# Altium PCB MainPCB.PcbDoc
Units mm, origin at the board's own origin, x right, y up, seen from the top; angles counter-clockwise.
Board outline 55 x 55 mm, 2 copper layers (Top Layer, Bottom Layer); 53 components, 38 nets, 207 pads, 63 vias.
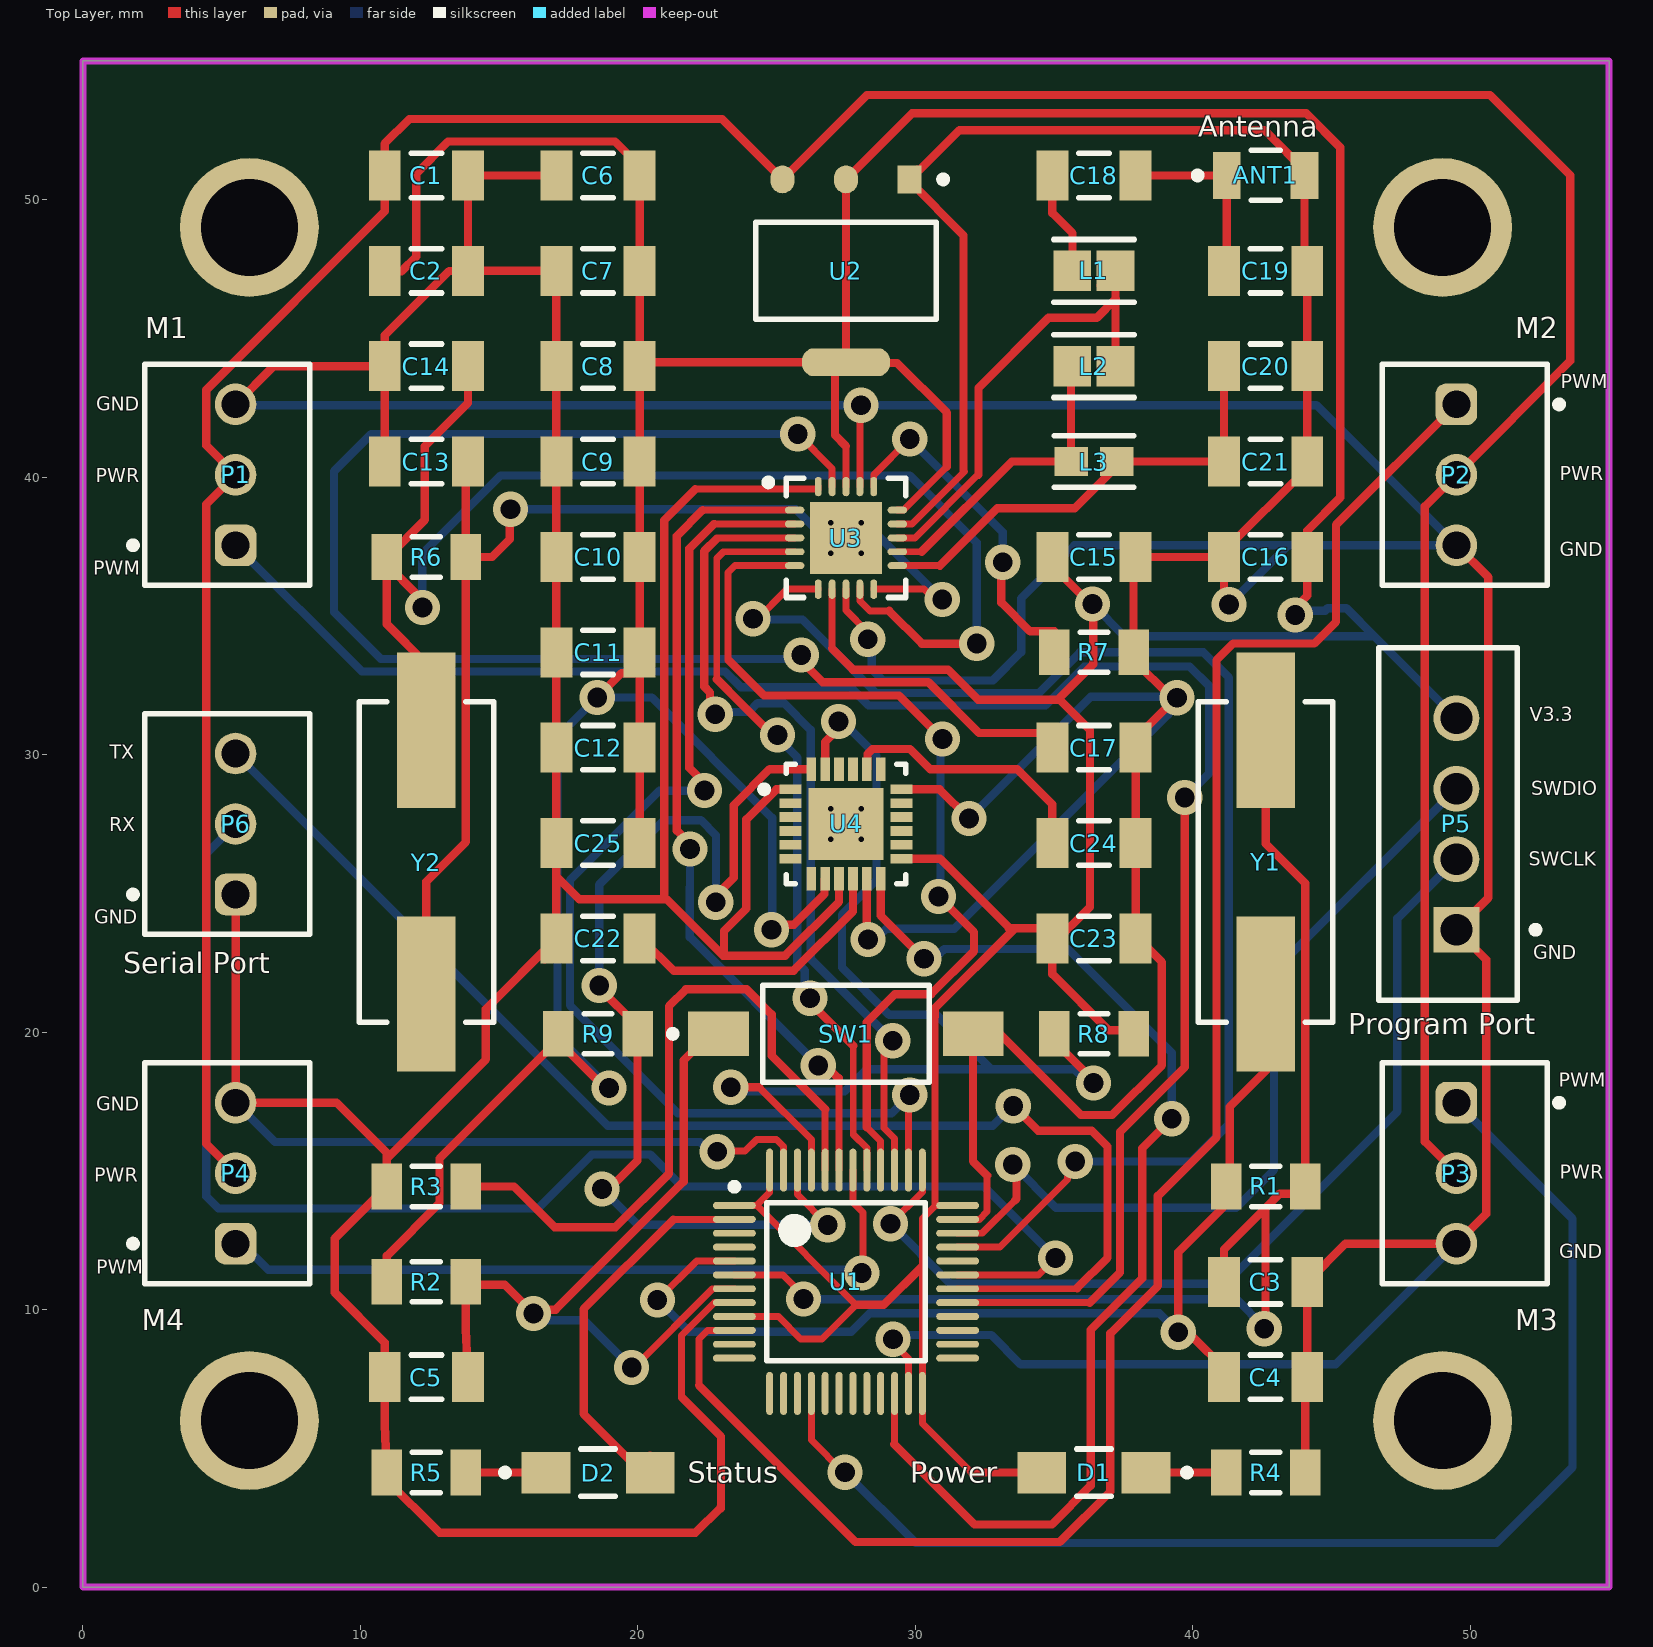
[diagram p0: Top Layer view]
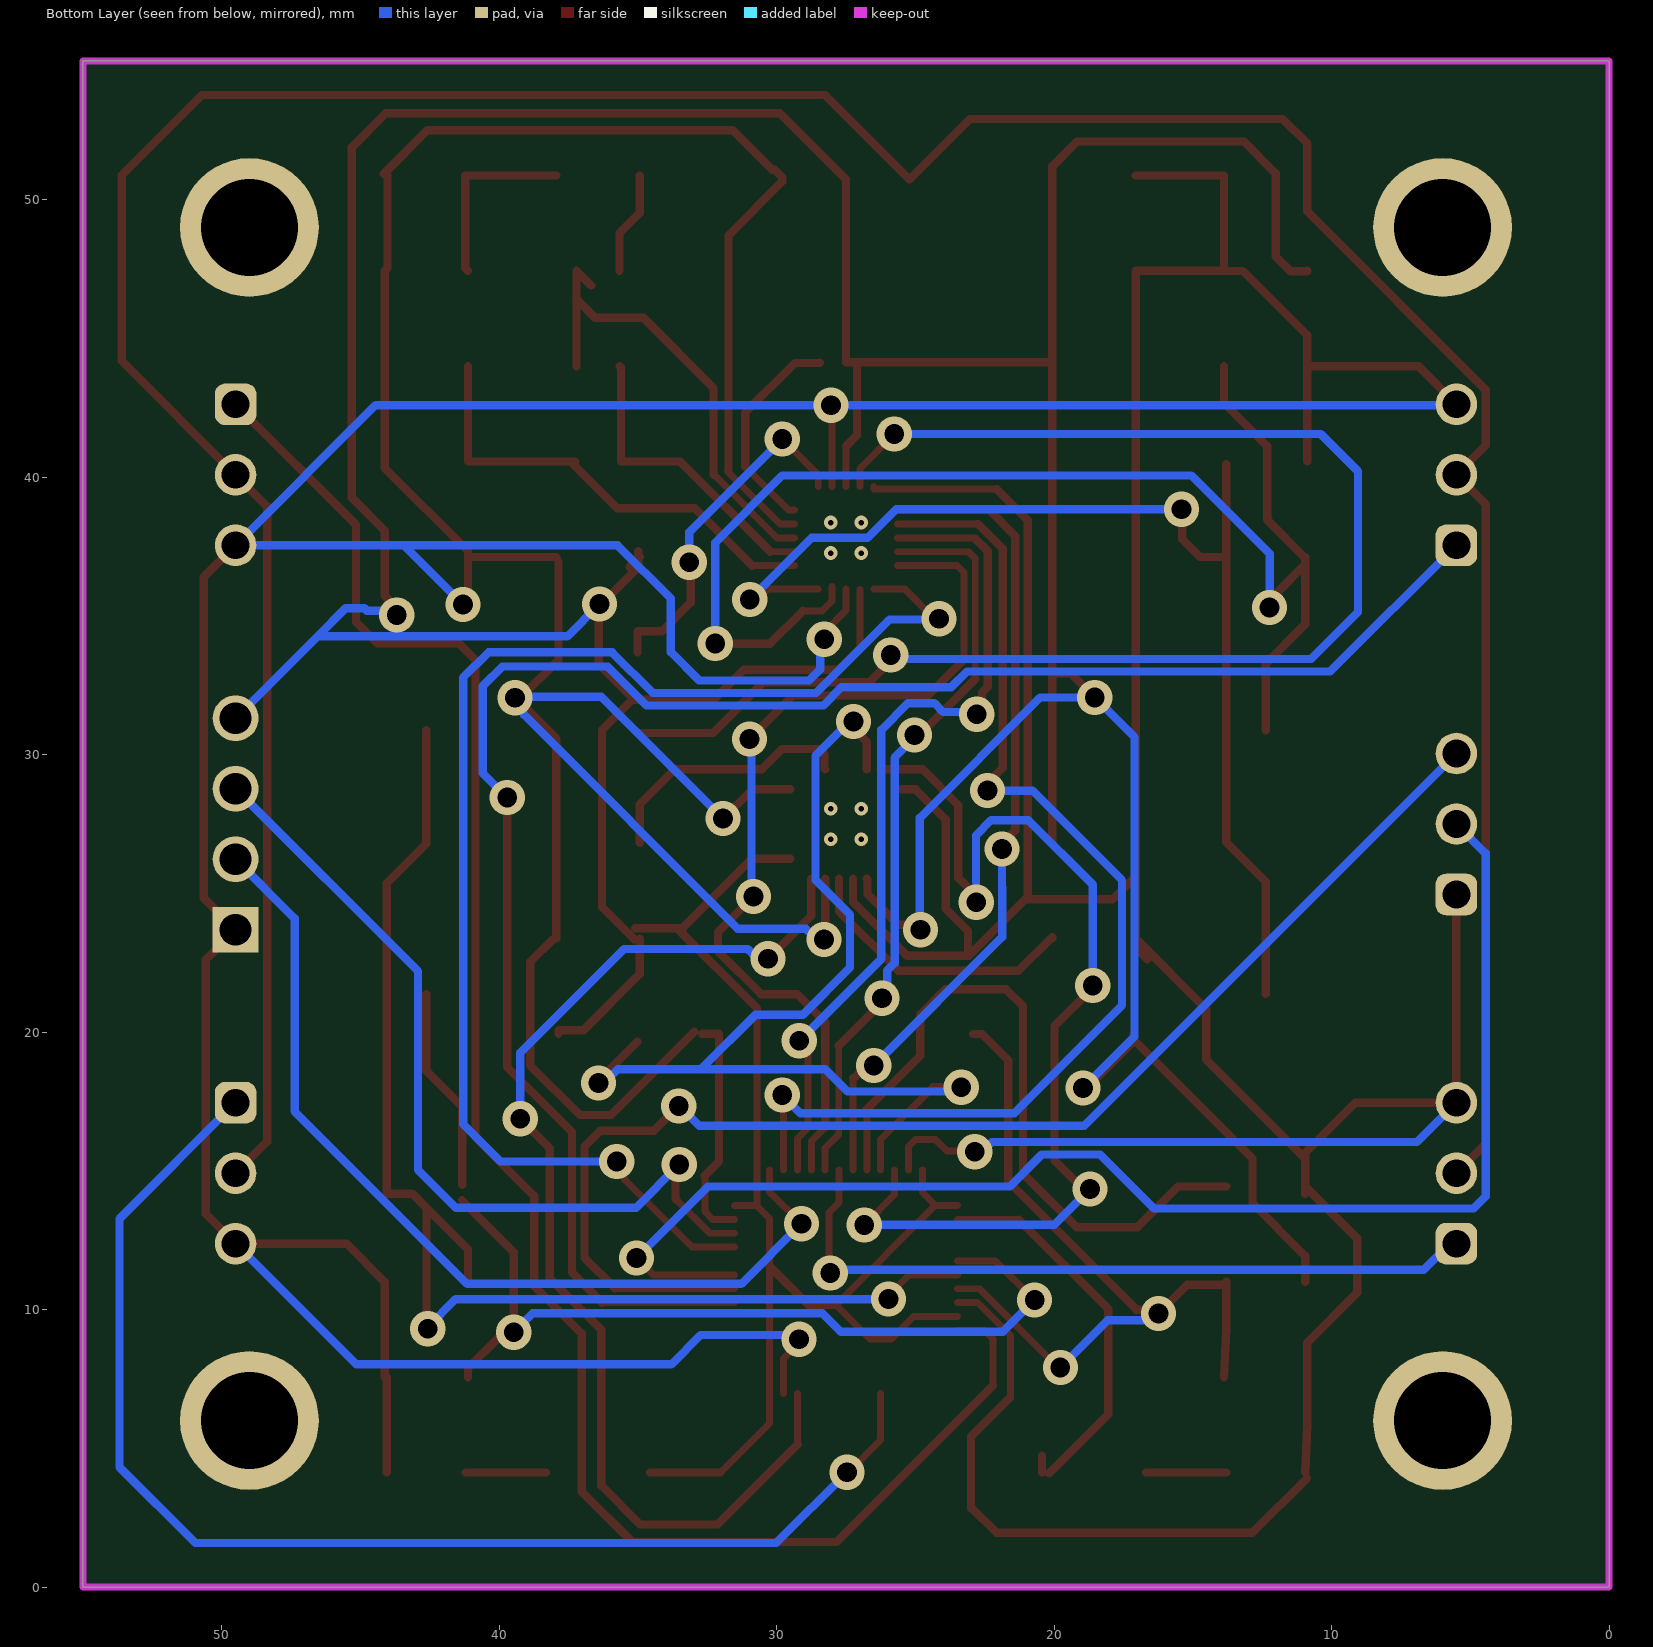
[diagram p1: Bottom Layer view, seen from below]

## Layer stack, top to bottom
Top Solder: solder mask 0.0102, Solder Resist, Dk 3.5
Top Layer: signal copper 0.0356
Dielectric 1: dielectric 0.32, FR-4, Dk 4.8
Bottom Layer: signal copper 0.0356
Bottom Solder: solder mask 0.0102, Solder Resist, Dk 3.5

## Board outline
0,0 55,0 55,55 0,55

## Design rules (kind name [scope] priority, off if disabled: settings)
Clearance [All] p1: gap=0.15 ignorepadtopadclearanceinfootprint=TRUE
HoleSize [All] p1: absolutevalues=TRUE maxlimit=5 minlimit=0.3 maxpercent=80.000 minpercent=20.000
HoleToHoleClearance [All] p1: gap=1.3 allowstackedmicrovias=FALSE
PolygonConnect [All] p1: connectstyle=Relief reliefconductorwidth=0.254 reliefentries=4 polygonreliefangle="90 Angle" airgapwidth=0.254
RoutingCorners [All] p1: cornerstyle=45-Degree minsetback=5 maxsetback=5
RoutingVias [All] p1: holewidth=0.711 width=1.27 viastyle="Through Hole" minholewidth=0.711 minwidth=1.27 maxholewidth=0.711 maxwidth=1.27
SMDNeckDown [All] p1: percent=100.000
SolderMaskExpansion [All] p1: expansion=0.102 istentingtop=FALSE
Width [All] p1: maxlimit=0.4 minlimit=0.2 preferedwidth=0.3
27 further rules are at their usual default settings.

## Classes and differential pairs
component class NRF24L01: ANT1 C13 C14 C15 C16 C17 C18 C19 C20 C21 L1 L2 L3 R6 R7 U3 Y2
component class MPU6050: C22 C23 C24 C25 R8 R9 U4
component class Microcontroller: C1 C2 C3 C4 C5 C6 C7 C8 C9 C10 C11 C12 D1 D2 P5 P6 R1 R2 R3 R4 R5 SW1 U1 U2 Y1
component class General: P1 P2 P3 P4

## Components (designator, comment, footprint, x,y, rotation, side; value= is the part's Value field where it differs from the comment)
ANT1 "Antenna" FP-211964-0001-MFG 42.625,50.875 r0 top
C1 "CAP 1206" CAPC1206(3216)190_N 12.375,50.875 r180 top value=10uF
C2 "CAP 1206" CAPC1206(3216)190_N 12.375,47.437 r180 top value=22uF
C3 "CAP 1206" CAPC1206(3216)190_N 42.625,11 r0 top value=22pf
C4 "CAP 1206" CAPC1206(3216)190_N 42.625,7.563 r0 top value=22pf
C5 "CAP 1206" CAPC1206(3216)190_N 12.375,7.563 r0 top value=100nf
C6 "CAP 1206" CAPC1206(3216)190_N 18.563,50.875 r0 top value=1uf
C7 "CAP 1206" CAPC1206(3216)190_N 18.563,47.437 r0 top value=10nf
C8 "CAP 1206" CAPC1206(3216)190_N 18.563,44 r0 top value=100nf
C9 "CAP 1206" CAPC1206(3216)190_N 18.563,40.562 r0 top value=100nf
C10 "CAP 1206" CAPC1206(3216)190_N 18.563,37.125 r0 top value=100nf
C11 "CAP 1206" CAPC1206(3216)190_N 18.563,33.687 r0 top value=100nf
C12 "CAP 1206" CAPC1206(3216)190_N 18.563,30.25 r0 top value=4.7uf
C13 "CAP 1206" CAPC1206(3216)190_N 12.375,40.562 r180 top value=22pf
C14 "CAP 1206" CAPC1206(3216)190_N 12.375,44 r180 top value=22pf
C15 "CAP 1206" CAPC1206(3216)190_N 36.437,37.125 r0 top value=10nf
C16 "CAP 1206" CAPC1206(3216)190_N 42.625,37.125 r180 top value=1nf
C17 "CAP 1206" CAPC1206(3216)190_N 36.437,30.25 r0 top value=33nf
C18 "CAP 1206" CAPC1206(3216)190_N 36.437,50.875 r0 top value=1.5pf
C19 "CAP 1206" CAPC1206(3216)190_N 42.625,47.437 r180 top value=1pf
C20 "CAP 1206" CAPC1206(3216)190_N 42.625,44 r180 top value=2.2nf
C21 "CAP 1206" CAPC1206(3216)190_N 42.625,40.562 r180 top value=4.7pf
C22 "CAP 1206" CAPC1206(3216)190_N 18.563,23.375 r180 top value=100nf
C23 "CAP 1206" CAPC1206(3216)190_N 36.437,23.375 r180 top value=10nf
C24 "CAP 1206" CAPC1206(3216)190_N 36.437,26.812 r180 top value=2.2nf
C25 "CAP 1206" CAPC1206(3216)190_N 18.563,26.812 r0 top value=100nf
D1 "Power" FP-CMD15-21-MFG 36.437,4.125 r180 top
D2 "Status" FP-CMD15-21-MFG 18.563,4.125 r0 top
L1 "LQM21NNR15K10D" FP-LQM21DN_00-IPC_B 36.437,47.437 r180 top
L2 "LQM21NNR15K10D" FP-LQM21DN_00-IPC_B 36.437,44 r180 top
L3 "LQG18HN2N2S00D" FP-LQG18HH_00-IPC_A 36.437,40.562 r0 top
P1 "M1" 61900311121 5.2,40.085 r270 top
P2 "M2" 61900311121 49.8,40.085 r90 top
P3 "M3" 61900311121 49.8,14.915 r90 top
P4 "M4" 61900311121 5.2,14.915 r270 top
P5 "Program Port" TECO-280371-2_V 49.5,27.5 r90 top
P6 "Serial Port" 61900311121 5.2,27.5 r270 top
R1 "ERJ-8GEY0R00V" RESC3216X70X50NL05T20 42.625,14.438 r0 top value=1M
R2 "ERJ-8GEY0R00V" RESC3216X70X50NL05T20 12.375,11 r180 top value=10K
R3 "ERJ-8GEY0R00V" RESC3216X70X50NL05T20 12.375,14.438 r0 top value=10K
R4 "ERJ-8GEY0R00V" RESC3216X70X50NL05T20 42.625,4.125 r180 top value=510
R5 "ERJ-8GEY0R00V" RESC3216X70X50NL05T20 12.375,4.125 r0 top value=510
R6 "ERJ-8GEY0R00V" RESC3216X70X50NL05T20 12.375,37.125 r0 top value=1M
R7 "ERJ-8GEY0R00V" RESC3216X70X50NL05T20 36.437,33.687 r0 top value=22K
R8 "ERJ-8GEY0R00V" RESC3216X70X50NL05T20 36.437,19.937 r0 top value=4.7K
R9 "ERJ-8GEY0R00V" RESC3216X70X50NL05T20 18.563,19.937 r0 top value=4.7K
SW1 "FSMSM" TECO-FSMSM-2_V 27.5,19.937 r0 top
U1 "STM32F103C8T6" STM-LQFP48_L 27.5,11 r0 top
U2 "AMS1117-3.3" FP-AMS1117-IPC_C 27.5,47.437 r270 top
U3 "NRF24L01P-T" NRSC-QFN-20_L 27.5,37.813 r0 top
U4 "MPU-6050" IS-QFN-24_V 27.5,27.5 r0 top
Y1 "ABLS-8.000MHZ-B2-T" FP-ABLS-MFG 42.625,26.125 r270 top
Y2 "ABLS-8.000MHZ-B2-T" FP-ABLS-MFG 12.375,26.125 r90 top

## Footprints (in the part's own frame and the unit in brackets; to place one, negate y for a bottom-side part, rotate by r counter-clockwise, add the part's x,y. Pads: shape width x height; smd on the part's side, far side on the other; paste and mask are expansions set on the pad)
61900311121 [mm] "2.54mm Male Locking Header, 3p"
  rrect50% 1.5x1.5 hole 1: 1(2.54,0.3)
  round 1.5 hole 1: 2(0,0.3) 3(-2.54,0.3)
  silkscreen extent -3.98,-3.52 3.98,2.97, body extent -3.81,-2.9 3.81,2.9, height 11.53
CAPC1206(3216)190_N [mm] "Chip Capacitor, Body 3.2x1.6mm, Height 1.9mm, IPC Medium Density"
  rect 1.15x1.8 smd: 1(-1.5,0) 2(1.5,0)
  silkscreen extent -0.55,-0.8 0.55,0.8, body extent -1.7,-0.9 1.7,0.9, height 1.9
FP-211964-0001-MFG [mm]
  rect 1x1.7 smd paste+0 mask+0: 1(-1.4,0) 2(1.4,0)
  silkscreen extent -2.57,-0.9 0.52,0.9, body extent -2,-1 2,1, height 0.25
FP-ABLS-MFG [mm]
  rect 5.6x2.1 smd paste+0 mask+0: 1(-4.75,0) 2(4.75,0)
  silkscreen extent -5.78,-2.42 5.77,2.42, body extent -7.65,-2.52 7.65,2.52, height 0.25
FP-AMS1117-IPC_C [mm]
  rect 1.004x0.872 smd paste+0 mask+0: 1(-3.295,2.29)
  rrect100% 1.004x0.872 smd paste+0 mask+0: 2(-3.295,0) 3(-3.295,-2.29)
  rrect87% 1.004x3.182 smd paste+0 mask+0: 4(3.295,0)
  silkscreen extent -3.42,-3.25 1.75,3.63, body extent -3.9,-3.35 3.9,3.35, height 0.25
FP-CMD15-21-MFG [mm]
  rect 1.75x1.5 smd paste+0 mask+0: 1(-1.875,0) 2(1.875,0)
  silkscreen extent -3.48,-0.85 0.63,0.85, body extent -2.85,-0.95 2.85,0.95, height 0.25
FP-LQG18HH_00-IPC_A [mm]
  rect 1.206x1.058 smd paste+0 mask+0: 1(-0.826,0) 2(0.826,0)
  silkscreen extent -1.43,-0.93 1.43,0.93, body extent -1.93,-1.03 1.93,1.03, height 0.25
FP-LQM21DN_00-IPC_B [mm]
  rect 1.354x1.456 smd paste+0 mask+0: 1(-0.776,0) 2(0.776,0)
  silkscreen extent -1.45,-1.13 1.45,1.13, body extent -1.7,-0.98 1.7,0.98, height 0.25
IS-QFN-24_V [mm] "QFN, 24-Leads, Body 4x4mm, Pitch 0.5mm, Thermal Pad 2.7x2.6mm"
  rect 0.8x0.35 smd: 1(-2,1.25) 2(-2,0.75) 3(-2,0.25) 4(-2,-0.25) 5(-2,-0.75) 6(-2,-1.25) 13(2,-1.25) 14(2,-0.75) 15(2,-0.25) 16(2,0.25) 17(2,0.75) 18(2,1.25)
  rect 0.35x0.85 smd mask+0.102: 7(-1.25,-1.975) 8(-0.75,-1.975) 9(-0.25,-1.975) 10(0.25,-1.975) 11(0.75,-1.975) 12(1.25,-1.975) 19(1.25,1.975) 20(0.75,1.975) 21(0.25,1.975) 22(-0.25,1.975) 23(-0.75,1.975) 24(-1.25,1.975)
  rect 2.7x2.6 smd: 25(0,0)
  silkscreen extent -3.07,-2.15 2.15,2.15, body extent -2,-2 2,2, height 0.95
NRSC-QFN-20_L [mm] "QFN, 20-Leads, Body 4x4mm, Pitch 0.5mm, Thermal Pad 2.6x2.6mm, IPC High Density"
  oval 0.7x0.25 smd: 1(-1.85,1) 2(-1.85,0.5) 3(-1.85,0) 4(-1.85,-0.5) 5(-1.85,-1) 11(1.85,-1) 12(1.85,-0.5) 13(1.85,0) 14(1.85,0.5) 15(1.85,1)
  oval 0.25x0.7 smd: 6(-1,-1.85) 7(-0.5,-1.85) 8(0,-1.85) 9(0.5,-1.85) 10(1,-1.85) 16(1,1.85) 17(0.5,1.85) 18(0,1.85) 19(-0.5,1.85) 20(-1,1.85)
  rect 2.6x2.6 smd: 21(0,0)
  silkscreen extent -2.92,-2.15 2.15,2.15, body extent -2,-2 2,2, height 0.95
RESC3216X70X50NL05T20 [mm] "Chip Resistor, 2-Leads, Body 3.20x1.60mm, IPC Medium Density"
  rect 1.1x1.65 smd: 1(-1.425,0) 2(1.425,0)
  silkscreen extent -0.5,-0.73 0.5,0.73, body extent -1.63,-0.82 1.62,0.82, height 0.7
STM-LQFP48_L [mm] "QFP, 48-Leads, Body 7x7mm, Pitch 0.5mm, IPC High Density"
  oval 1.55x0.25 smd: 1(-4.025,2.75) 2(-4.025,2.25) 3(-4.025,1.75) 4(-4.025,1.25) 5(-4.025,0.75) 6(-4.025,0.25) 7(-4.025,-0.25) 8(-4.025,-0.75) 9(-4.025,-1.25) 10(-4.025,-1.75) 11(-4.025,-2.25) 12(-4.025,-2.75) 25(4.025,-2.75) 26(4.025,-2.25) 27(4.025,-1.75) 28(4.025,-1.25) 29(4.025,-0.75) 30(4.025,-0.25) 31(4.025,0.25) 32(4.025,0.75) 33(4.025,1.25) 34(4.025,1.75) 35(4.025,2.25) 36(4.025,2.75)
  oval 0.25x1.55 smd: 13(-2.75,-4.025) 14(-2.25,-4.025) 15(-1.75,-4.025) 16(-1.25,-4.025) 17(-0.75,-4.025) 18(-0.25,-4.025) 19(0.25,-4.025) 20(0.75,-4.025) 21(1.25,-4.025) 22(1.75,-4.025) 23(2.25,-4.025) 24(2.75,-4.025) 37(2.75,4.025) 38(2.25,4.025) 39(1.75,4.025) 40(1.25,4.025) 41(0.75,4.025) 42(0.25,4.025) 43(-0.25,4.025) 44(-0.75,4.025) 45(-1.25,4.025) 46(-1.75,4.025) 47(-2.25,4.025) 48(-2.75,4.025)
  silkscreen extent -4.15,-2.85 2.85,3.55, body extent -3.5,-3.5 3.5,3.5, height 1.6
TECO-280371-2_V [mm] "Male Header, 4-Leads, Body 12.7x5mm, Pitch 2.54"
  rect 1.65x1.65 hole 1.15: 1(-3.81,0)
  round 1.65 hole 1.15: 2(-1.27,0) 3(1.27,0) 4(3.81,0)
  silkscreen extent -6.35,-2.98 6.35,2.8, body extent -6.22,-2.21 6.23,2.79, height 12.6
TECO-FSMSM-2_V [mm] "SMD, 2-Leads, Body 6x3.5mm, Pitch 9.19mm"
  rect 2.2x1.6 smd: 1(-4.595,0)
  rect 2.18x1.6 smd: 2(4.595,0)
  silkscreen extent -6.37,-1.75 3,1.75, body extent -4.98,-1.75 4.98,1.75, height 4.4

## Part data
ANT1: library part CMP-04721-000010-1, "2.4/5GHZ LTCC ANT 3.2X1.6MM"
C1 C2 C3 C4 C5 C6 C7 C8 C9 C10 C11 C12 C13 C14 C15 C16 C17 C18 C19 C20 C21 C22 C23 C24 C25: library part CMP-1037-04961-1, Case-EIA=1206, Case-Metric=3216, Rated Voltage="6.3 V", Tolerance=Â±10%, Max Thickness="1.9 mm", Technology=SMT
D1 D2: library part CMP-53976-000002-1, "LED RED DIFFUSED 1206 SMD", Colour=Red, Forward Current=20mA, Forward Voltage=2V, Manufacturer=VCC, Manufacturer Part Number=CMD15-21VRD/TR8, Package=CMD15-21, Power Dissipation=105mW, Reverse Voltage=5V, Temperature="-40°C to +85°C", Temperature Range High=+85°C, Temperature Range Low=-40°C, Automotive=No, Category=Diode, ComponentLink2Description=Datasheet, ComponentLink2URL=https://www.vcclite.com/wp-content/uploads/wpallimport/files/files/CMD1521SeriesRev1.pdf, Device Class L1=Optoelectronics, Device Class L2=LEDs, Device Class L3=unset, Digikey Description="LED RED DIFFUSED 1206 SMD", Height=1.3mm, Lead Free=Yes, Led Orientation="Top View", Luminous Intensity=4mcd, Mouser Description="Standard LEDs - SMD RED DIFFUSED", Octopart=https://octopart.com/cmd15-21vrd%2Ftr8-vcc-26668835, Peak Emmision Wavelength=640nm, RoHS=TRUE
L1: library part CMP-06042-016815-1, "Multilayer Type Inductor for General Circuits, 0805 (2012), 0.15μH, 10%, 0.32Ω, 250mA", Case Code (Imperial)=0805, Case Code (Metric)=2012, Current Rating=250mA, DC Resistance (DCR)=320mR, Inductance=3.9nH, Inductance Tolerance=10%, Max Operating Temperature=85°C, Min Operating Temperature=-40°C, Package Quantity=4000, Self Resonant Frequency=270MHz, Test Frequency=25MHz, Case/Package=0805, Core Material=Ferrite, DC Current=250mA, Depth=1.45mm, Height=0.85mm, Height - Seated (Max)=0.041inch, Lead Free="Lead Free", Length=2mm, Max DC Current=250mA, Military Standard=Not, Mount="Surface Mount", Number of Pins=2, Packaging="Tape and Reel", Q Factor=20, Radiation Hardening=No, REACH SVHC="No SVHC", RoHS Compliant=Yes, Series=LQM21N, Shielding=Shielded, Termination=SMD/SMT, Tolerance=10%, Width=1.25mm
L2: library part CMP-06042-016815-1, "Multilayer Type Inductor for General Circuits, 0805 (2012), 0.15μH, 10%, 0.32Ω, 250mA", Case Code (Imperial)=0805, Case Code (Metric)=2012, Current Rating=250mA, DC Resistance (DCR)=320mR, Inductance=8.2nH, Inductance Tolerance=10%, Max Operating Temperature=85°C, Min Operating Temperature=-40°C, Package Quantity=4000, Self Resonant Frequency=270MHz, Test Frequency=25MHz, Case/Package=0805, Core Material=Ferrite, DC Current=250mA, Depth=1.45mm, Height=0.85mm, Height - Seated (Max)=0.041inch, Lead Free="Lead Free", Length=2mm, Max DC Current=250mA, Military Standard=Not, Mount="Surface Mount", Number of Pins=2, Packaging="Tape and Reel", Q Factor=20, Radiation Hardening=No, REACH SVHC="No SVHC", RoHS Compliant=Yes, Series=LQM21N, Shielding=Shielded, Termination=SMD/SMT, Tolerance=10%, Width=1.25mm
L3: library part CMP-06042-006288-1, "Multilayer type RF Inductor 2.2nH ±0.3nH 0.1Ω 1100mA 0603", Case Code (Imperial)=0603, Case Code (Metric)=1608, Current Rating=500mA, DC Resistance (DCR)=100mR, Inductance=2.7nH, Max Operating Temperature=85°C, Min Operating Temperature=-40°C, Package Quantity=4000, Self Resonant Frequency=6GHz, Test Frequency=100MHz, Case/Package=0603, Core Material=Air, DC Current=500mA, Depth=0.95mm, Height=0.8mm, Height - Seated (Max)=0.037inch, Lead Free="Lead Free", Length=0.063inch, Max DC Current=500mA, Military Standard=Not, Mount="Surface Mount", Number of Pins=2, Packaging="Tape and Reel", Q Factor=12, Radiation Hardening=No, REACH SVHC="No SVHC", Shielding=Unshielded, Termination=SMD/SMT, Width=0.031inch
P1 P2 P3 P4 P6: library part CMP-1502-00585-2, Color=Beige, Contact Resistance=20mΩ, Current Rating=3A, Flammability Rating="UL94 V-0", Insulation Resistance=1GΩ, Max Operating Temperature=105°C, Min Operating Temperature=-40°C, Operating Supply Voltage=250V, Connector Type="Male Pin", Contact Gender=Male, Contact Material=Copper, Contact Mating Length=7.493mm, Contact Plating=Tin, Fastening Type=Friction, Gender=Male, Height=12.5mm, Housing Material=Nylon, Lead Pitch=2.54mm, Length=7.62mm, Mount="Through Hole", NexarPartId=18818222, Number of Contacts=3, Number of Pins=3, Number of Positions=3, Number of Rows=1, Orientation=Vertical, Packaging=Bulk, Pitch=2.54mm, REACH SVHC=Unknown, RoHS=Compliant, Termination="Through Hole", Voltage Rating=250V, Width=7.66mm
P5: library part CMP-2000-05548-1, "Male Header, Pitch 2.54 mm, 1 x 4 Position, Height 12.8 mm, Tail Length 3.5 mm, -55 to 105 degC, RoHS, Bulk", Color=Black, Manufacturer="TE Connectivity", Package Description="Male Header, Pitch 2.54 mm, 1 x 4 Position, Height 12.8 mm, Tail Length 3.5 mm", Package Reference=280371-2, Standard Package=1,000, 3D Model=280371-2.pdf, Category=Connectors,Interconnects, Connector Type=Header,Shrouded, Contact Finish=Gold, Contact Finish Thickness=15µin(0.38µm), Contact Mating Length="0.260\"(6.60mm)", Contact Type=MalePin, Datasheet URL=http://www.te.com/commerce/DocumentDelivery/DDEController?Action=showdoc&DocId=Customer+Drawing%7F280370%7FM1%7Fpdf%7FEnglish%7FENG_CD_280370_M1.pdf%7F280371-2, Datasheet Version="Rev. M1, 08/2016", Dynamic Catalog=AMPMODUModIISeries, Family=RectangularConnectors-Headers,MalePins, Manufacturer URL=http://www.te.com/, Mounting Technology=ThroughHole, Mounting Type=ThroughHole, Number of Positions=4, Number of Positions Loaded=All, Number of Rows=1, Other Names="280371-2-ND / A106401", Packaging=Bulk, Pitch="0.100\"(2.54mm)", RoHS Information=280371-2StatementofCompliance, Series=AMPMODUModII, Termination=Solder
R1 R2 R3 R4 R5 R6 R7 R8 R9: library part CMP-2003-00541-1, Manufacturer=Panasonic, Part Number=ERJ-8GEY0R00V
SW1: library part CMP-2000-07511-1, "FSMSM Push Button Switch, 50 mA, -35 to 85 degC, 2-Pin SMD, RoHS, Bulk", Case\/Package=SMD/SMT, Contact Current Rating=50mA, Contact Resistance=100mOhm, Manufacturer="TE Connectivity", Max Operating Temperature=85degC, Max Voltage Rating (DC)=12V, Min Operating Temperature=-35degC, Operating Force=180gf, Package Description="2-Pin Surface Mount Device, Body 6 x 3.5 mm, Pitch 9.19 mm", Package Quantity=1000, Voltage Rating (DC)=24V, Actuator Length=1.07mm, Actuator Material=Polyamide, Contact Material=Brass, Contact Plating=Silver, Current Rating=50mA, Datasheet URL=http://www.te.com/commerce/DocumentDelivery/DDEController?Action=showdoc&DocId=Customer+Drawing%7F1437566-3%7FC2%7Fpdf%7FEnglish%7FENG_CD_1437566-3_C2_1437566_3_1_c.dwg.pdf%7F1437566-3, Datasheet Version="Rev. C2, 08/2014", Electrical Life=20000Cycles, ELV=Compliant, Illumination Type=Illuminated, Lead Free=LeadFree, Manufacturer URL=http://www.te.com/, Mechanical Life=20000Cycles, Mount=SurfaceMount, Mounting Technology=SurfaceMount, Orientation=Straight, Package Reference=FSMSM, Packaging=LoosePiece, REACH SVHC=Unknown, RoHSCompliant=true, Switch Travel=0.25mm, Termination=GullWing, Throw Configuration=SPST
U1: library part CMP-0237-00215-3, "ARM Cortex-M3 32-bit MCU, 64 KB Flash, 20 KB Internal RAM, 37 I/Os, 48-pin LQFP, -40 to 85 degC, Tray", I/Os (High Current)=37, Operating Frequency(F) (Processor speed) (MHz)=72, Supply Voltage(Vcc) min (V)=2, A/D Converter="2x12-bit (10 Channel)", ComponentLink1Description="Manufacturer URL", ComponentLink1URL=http://www.st.com/web/en/home.html, ComponentLink2Description=Datasheet, ComponentLink2URL=http://www.st.com/st-web-ui/static/active/en/resource/technical/document/datasheet/CD00161566.pdf, ComponentLink3Description="Package Specification", ComponentLink3URL=http://www.st.com/st-web-ui/static/active/en/resource/technical/document/datasheet/DM00058181.pdf, Core="ARM Cortex-M3", DatasheetVersion="Rev. 16", FLASH Size (Prog) (kB)=64, Internal RAM Size (kB)=20, Mounting Technology="Surface Mount", PackageDescription="48-Pin Low Profile Quad Flat Package, 7 x 7 mm Body, 0.5 mm Pitch", PackageReference=LQFP48, PackageVersion="Rev. 6, 06/2013", Packing=Tray, PartNumber=STM32F103C8T6
U2: library part CMP-209535-000001-1, "LDO Voltage Regulators 1A, 3.3V", Dropout Voltage=1.1V, Manufacturer="Advanced Monolithic Systems", Max Junction Temp=+125°C, Max Power Dissipation=1.2W, Max Supply Voltage=15V, Nominal Supply Current=5mA, Output Current=1A, Output Voltage=3.3V, Package=AMS1117, Temperature="-40°C to +125°C", Temperature Range Low=-40°C, Automotive=No, Category=IC, ComponentLink2Description=Datasheet, ComponentLink2URL=http://www.advanced-monolithic.com/pdf/ds1117.pdf, Device Class L1="Integrated Circuits (ICs)", Device Class L2="Power Management ICs", Device Class L3="Voltage Regulators - Linear", Height=1.8mm, Ipc Land Pattern Name=SOT229P700X180-4, Lead Free=Yes, Manufacturer Part Number=AMS1117-3.3, Number Of Outputs=1, Octopart=https://octopart.com/ams1117-3.3-advanced+monolithic+systems-25899300, Output Type=Fixed, RoHS=TRUE, Standoff Height=0.64mm, Temperature Range High=+125°C
U3: library part CMP-2000-06859-1, "Single Chip Transceiver, 2.4 GHz, 60 mW, 1.9 to 3.6 V, -40 to 85 degC, 20-Pin QFN, RoHS, Tray", Current - Receiving=12.6mA~13.5mA, Current - Transmitting=7mA~11.3mA, Frequency=2.4GHz, Manufacturer="Nordic Semiconductor", Operating Temperature=-40°C~85°C, Package / Case=20-VFQFNExposedPad, Package Description="20-Pin Quad Flat No-lead Package, Body 4 x 4 mm, Pitch 0.5 mm", Package Reference=QFN20, Power - Output=0dBm, Standard Package=490, Voltage - Supply=1.9V~3.6V, Category=RF/IFandRFID, Data Rate (Max)=2Mbps, Datasheet URL=http://www.nordicsemi.com/eng/content/download/2726/34069/file/nRF24L01P_Product_Specification_1_0.pdf, Datasheet Version="Rev. 1.0, 09/2008", Design Resources=DevelopmentToolSelector, Family=RFTransceiverICs, For Use With=1490-1002-ND-KITEVALUATIONNRF24L01P1568-1295-ND-SPARKFUNTRANSCEIVERBREAKOUT-1568-1296-ND-SPARKFUNTRANSCEIVERBREAKOUT-1471-1410-ND-DEVBOARDNRFSCLICKNRF24L01P-MODULE-PCB-ND-KITEVALNRF24L01+PCBANTENNANRF24L01P-MODULE-SMA-ND-KITEVALNRF24L01+SMACONNNRF24L01P-UPGRADE-ND-UPGRADE2PCB/1SMANRF24L01103990038-ND-DEVDUINOSENSORNODEV1.3103990053-ND-DEVDUINOSENSORNODEV2(ATMEGA103990074-ND-DEVDUINOSENSORNODE106990026-ND-ENERGYMONITORSHIELDV2113990088-ND-WIRELESSGATESHIELD113990095-ND-DEVDUINOSENSORNODEV3(ATMEGA106030001-ND-ENERGYMONITORSHIELD1597-1361-ND-DEVDUINOSENSORNODEV2.2(ATMEG105990030-ND-RGBWSTRIPWIRELESSSHIELDV1.0, GPIO=-, Manufacturer URL=http://www.nordicsemi.com/eng/Products/, Memory Size=-, Modulation=GFSK, Mounting Technology=SurfaceMount, Online Catalog=nRF24L01+, Other Names=1490-1019, Packaging=Tray, Protocol=-, RF Family/Standard=GeneralISM>1GHZ, Sensitivity=-94dBm, Serial Interfaces=SPI, Series=-, Type=TxRxOnly
U4: library part CMP-1753-00002-2, "3-Axis Gyroscope, Accelerometer and a Digital Motion Processor(TM) (DMP), 2.375 to 3.46 V, -40 to 85 degC, 24-Pin QFN, RoHS, Tape and Reel", Manufacturer=InvenSense, Standard Package=5,000, Category=Sensors,Transducers, Datasheet URL=http://datasheet.octopart.com/MPU-6050-InvenSense-datasheet-14421344.pdf, Datasheet Version="Rev. 3.3, 05/2012", Dynamic Catalog=MPU-6000™Series, Family=Multifunction, Featured Product=MPU-60506-Axis,IntegratedI²CSolution, Manufacturer URL=http://www.invensense.com/, Online Catalog=MPU-6000™Series, Other Names="1428-1007-2 / MPU6050", Output Type=Digital, Sensor Type=MotionTracking, Unit PriceUSD=Digital
Y1: library part CMP-27762-009874-1, "CRYSTAL 8.0000MHZ 18PF SMD", Case/Package=SMD/SMT, ESR (Equivalent Series Resistance)=80R, Frequency=8MHz, Frequency Stability=50ppm, Frequency Tolerance=20ppm, Load Capacitance=18pF, Max Operating Temperature=70°C, Min Operating Temperature=-20°C, Operating Frequency="8 MHz", Package Quantity=1000, Accuracy=20ppm, Contact Plating=Tin, Depth=4.7mm, Height=0.165inch, Lead Free="Lead Free", Length=11.4mm, Mount="Surface Mount", Number of Pins=2, Packaging="Tape and Reel", Radiation Hardening=No, REACH SVHC="No SVHC", Series=ABLS, Series Resistance=80R, Termination=SMD/SMT, Tolerance=20ppm, Width=4.7mm
Y2: library part CMP-27762-009874-1, "CRYSTAL 8.0000MHZ 18PF SMD", Case/Package=SMD/SMT, ESR (Equivalent Series Resistance)=80R, Frequency=8MHz, Frequency Stability=50ppm, Frequency Tolerance=20ppm, Load Capacitance=18pF, Max Operating Temperature=70°C, Min Operating Temperature=-20°C, Operating Frequency="16 MHz", Package Quantity=1000, Accuracy=20ppm, Contact Plating=Tin, Depth=4.7mm, Height=0.165inch, Lead Free="Lead Free", Length=11.4mm, Mount="Surface Mount", Number of Pins=2, Packaging="Tape and Reel", Radiation Hardening=No, REACH SVHC="No SVHC", Series=ABLS, Series Resistance=80R, Termination=SMD/SMT, Tolerance=20ppm, Width=4.7mm

## Free pads (board coordinates)
  round 5 hole 3.5 unplated: 2(6,6) 2(6,49) 2(49,6) 2(49,49)

## Via types
v1: diameter 1.27, hole 0.711, Top Layer to Bottom Layer, 55 vias
v2: diameter 0.5, hole 0.2, Top Layer to Bottom Layer, 8 vias

## Nets (pads, with @x,y where several pads share a name; then routed paths per layer and width w, separated by ;. In a path a pad name is that pad's centre, name@x,y a point inside that pad or via, vN(x,y) a via of type N, cw(c..) or ccw(c..) an arc to the next point about the centre after c; other vN are vias at no path point)
ANT1: L2.2 L3.1 U3.12 | length 11.1
  Top Layer w0.25: U3.12 30.229,37.313
  Top Layer w0.3: 30.229,37.313 33.479,40.562 L3.1 35.611,43.95 L2.2
ANT2: L1.1 L2.1 U3.13 | length 17.4
  Top Layer w0.25: U3.13 29.981,37.813 32.243,40.075
  Top Layer w0.3: 32.277,40.088 32.277,43.222 34.8,45.746 36.539,45.746 37.213,46.42 ; L1.1@36.686,46.91 L1.1 37.213,46.42 ; L2.1 37.213,46.42 ; 37.226,46.432 37.213,46.42
BOOT0: R3.2 U1.44 | length 25.5
  Top Layer w0.25: U1.44 26.75,17.221
  Top Layer w0.3: R3.2 15.534,14.438 ; 15.527,14.437 16.992,12.972 19.195,12.972 21.118,14.895 ; 21.121,14.911 21.121,20.934 21.726,21.539 23.922,21.539 24.821,20.64 24.821,19.15 26.75,17.221
GND: ANT1.2 C1.1 C2.1 C3.2 C4.2 C5.1 C6.1 C7.1 C8.1 C9.1 C10.1 C11.1 C12.1 C13.2 C14.2 C15.2 C16.2 C17.2 C19.1 C20.1 C21.1 C22.2 C23.1 C24.1 C25.1 P1.3 P2.3 P3.3 P4.3 P5.1 P6.1 R3.1 R4.1 R5.1 R7.2 SW1.2 U1.8 U1.23 U1.35 U1.47 U2.1 U3.8 U3.14 U3.17 U3.20 U4.1 U4.9 U4.11 U4.18 | length 430.9
  Top Layer w0.25: 21.579,6.811 21.579,9.069 22.759,10.25 U1.8 ; 22.073,39.573 26.5,39.573 U3.20 ; v1(22.856,15.689) 22.886,15.718 23.866,15.718 24.283,16.135 24.987,16.135 25.25,15.873 U1.47 ; U3.8@27.5,35.913 27.5,35.204 28.281,34.422 v1(28.281,34.157) ; U3.8@27.5,35.738 U3.8 ; U3.17 v1@28,42.554 ; v1(29.192,8.928) 29.192,8.795 29.75,8.237 U1.23 ; U3.14 29.88,38.313 31.774,40.207 ; U1.35 32.309,13.25 32.588,13.529 32.588,14.834
  Top Layer w0.3: P6.1 P4.3 9.139,17.455 10.95,15.644 10.95,15.452 ; P1.3 6.875,44 C14.2 ; C13.2 C14.2 ; R5.1@10.888,3.919 12.849,1.958 22.073,1.958 22.969,2.854 ; R3.1@10.921,14.408 9.074,12.562 9.074,10.615 10.875,8.814 C5.1 10.875,5.866 R5.1 ; R3.1@10.95,14.163 R3.1 10.95,15.452 ; C2.1@13.913,47.432 13.196,47.432 10.875,45.11 C14.2 ; C22.2@16.638,22.625 17.063,23.05 C22.2 17.063,25.609 ; C22.2@17.003,23.315 14.517,20.83 14.517,19.019 10.95,15.452 ; C6.1 C1.1 C2.1 C7.1 C8.1 C9.1 C10.1 C11.1 C12.1 C25.1 17.063,25.609 ; 20.944,24.859 20.944,38.445 22.073,39.573 ; 21.605,6.811 22.993,5.424 22.993,2.829 ; 23.103,22.854 23.103,23.65 23.906,24.453 23.906,27.665 24.991,28.75 U4.1 ; 25.306,22.753 23.064,22.753 21.027,24.79 17.882,24.79 17.063,25.609 ; 25.326,22.772 27.25,24.696 U4.9 ; v1@28,42.554 v1(28.042,42.596) ; U4.11 28.25,23.38 v1(28.292,23.339) ; U4.18 30.878,28.75 v1(31.931,27.697) ; U2.1@29.796,50.711 29.796,50.805 30.076,51.085 30.17,51.085 31.591,52.505 42.582,52.505 ANT1.2@44.16,50.927 ; U2.1@29.799,50.658 31.738,48.718 31.738,40.224 ; 32.588,14.834 32.08,15.342 32.08,19.937 SW1.2 SW1.2@32.69,19.937 ; SW1.2@32.97,20.008 35.965,17.014 37.095,17.014 38.881,18.8 38.881,22.519 C23.1@38.051,23.349 ; C15.2@37.863,36.947 R7.2 37.863,33.413 39.224,32.051 v1@39.414,32.051 ; C23.1 C24.1 C17.2 37.937,30.575 v1@39.414,32.051 ; C15.2 C16.2 ; v1(39.434,32.051) v1@39.414,32.051 ; v1(41.3,35.408) 41.125,35.583 C16.2 ; ANT1.2 44.025,47.537 C19.1 C20.1 C21.1 44.125,40.338 41.125,37.338 C16.2 ; R4.1 C4.2@44.05,7.562 ; C4.2 44.125,9.271 C3.2 45.5,12.375 P3.3 50.571,13.446 50.571,22.619 P5.1 50.648,24.838 50.648,36.397 P2.3
  Bottom Layer w0.3: P4.3 6.919,16.036 22.246,16.036 22.594,15.689 v1(22.856,15.689) ; P1.3 5.529,42.596 v1(28.042,42.596) 44.449,42.596 P2.3 43.438,37.545 ; v1(28.281,34.157) 28.432,34.006 28.432,33.072 28.831,32.673 32.796,32.673 ; v1(28.292,23.339) 28.554,23.339 28.939,23.724 31.397,23.724 39.112,31.439 39.112,31.467 39.434,31.789 v1(39.434,32.051) 39.402,32.082 36.316,32.082 v1(31.931,27.697) ; v1(29.192,8.928) 29.344,9.08 32.739,9.08 33.795,8.023 45.148,8.023 P3.3 ; 32.807,32.69 33.813,33.696 33.813,35.63 35.728,37.545 43.438,37.545 ; v1(41.3,35.408) 43.438,37.545
MCU_OSCIN: C4.1 R1.1 U1.5 Y1.2 | length 38.6
  Top Layer w0.25: v1(20.702,10.342) 20.713,10.342 22.12,11.75 U1.5
  Top Layer w0.3: C4.1 41.125,7.887 40.016,8.997 39.664,8.997 v1(39.478,9.183) 39.478,12.075 R1.1@41.339,13.935 ; R1.1@41.327,14.491 41.327,17.298 42.625,18.595 Y1.2
  Bottom Layer w0.3: v1(20.702,10.342) 21.84,9.204 27.695,9.204 28.353,9.863 38.797,9.863 v1(39.478,9.183)
MCU_OSCOUT: C3.1 R1.2 U1.6 Y1.1 | length 46.6
  Top Layer w0.25: U1.6 25.235,11.25 25.972,10.512 v1(25.972,10.382)
  Top Layer w0.3: C3.1 41.125,12.169 42.621,13.665 ; v1(42.574,9.311) 42.621,9.359 42.621,13.665 ; Y1.1 42.625,26.793 44.05,25.368 R1.2 44.05,14.173 43.129,14.173 42.621,13.665
  Bottom Layer w0.3: v1(25.972,10.382) 25.979,10.375 41.57,10.375 42.574,9.371 v1(42.574,9.311)
NetANT1_1: ANT1.1 C18.2 C19.2 | length 6.8
  Top Layer w0.3: C18.2 ANT1.1 41.225,47.538 C19.2
NetC1_2: C1.2 P1.2 P2.2 P3.2 P4.2 U2.3 | length 126.1
  Top Layer w0.3: P4.2 4.445,15.97 4.445,39.03 P1.2 4.445,41.14 4.445,43.151 10.875,49.581 C1.2 10.875,52.019 11.764,52.908 23.034,52.908 U2.3 28.253,53.775 50.712,53.775 53.601,50.886 53.601,44.186 P2.2 48.362,38.947 48.362,16.053 P3.2
NetC17_1: C17.1 U3.19 | length 52.7
  Top Layer w0.25: v1(25.762,41.554) 27,40.316 U3.19
  Top Layer w0.3: v1(25.889,33.591) 25.889,33.378 26.656,32.611 30.465,32.611 32.295,30.781 C17.1@34.945,30.781
  Bottom Layer w0.3: v1(25.762,41.554) 10.39,41.554 9.049,40.214 9.049,35.133 10.736,33.446 25.744,33.446 v1(25.889,33.591)
NetC18_1: C18.1 L1.2 | length 3.7
  Top Layer w0.3: C18.1 34.937,49.518 35.662,48.793 L1.2
NetC22_1: C22.1 U4.10 | length 10.2
  Top Layer w0.3: C22.1 C22.1@20.062,23.419 ; C22.1@20.156,23.345 21.289,22.212 25.612,22.212 27.75,24.35 U4.10
NetC24_2: C24.2 U4.20 | length 9.5
  Top Layer w0.3: U4.20 28.275,29.5 28.275,30.024 28.451,30.2 29.809,30.2 30.54,29.469 33.676,29.469 34.937,28.207 C24.2
NetD1_1: D1.1 R4.2 | length 2.9
  Top Layer w0.3: D1.1 R4.2
NetD2_1: D2.1 R5.2 | length 2.9
  Top Layer w0.3: R5.2 D2.1
NetR7_1: R7.1 U3.16 | length 12.8
  Top Layer w0.25: U3.16 28.5,40.082 v1(29.795,41.377)
  Top Layer w0.3: v1@32.96,36.746 v1(33.146,36.932) ; v1@33.101,36.85 33.101,35.479 34.138,34.442 35.012,34.442 R7.1
  Bottom Layer w0.3: v1(29.795,41.377) 33.146,38.026 v1(33.146,36.932)
NRST: C5.2 R2.1 SW1.1 U1.7 | length 29
  Top Layer w0.25: v1(19.774,7.912) 19.856,7.912 22.694,10.75 U1.7
  Top Layer w0.3: R2.1 R2.1@13.8,10.998 ; C5.2 13.8,9.295 R2.1@13.8,10.998 ; SW1.1@22.91,19.932 22.6,19.932 21.651,18.983 21.651,14.61 17.036,9.995 16.379,9.995 v1(16.24,9.857) 15.197,10.9 13.898,10.9 R2.1@13.8,10.998
  Bottom Layer w0.3: v1(16.24,9.857) 16.503,9.857 16.746,9.613 18.073,9.613 v1(19.774,7.912)
PA0: P2.1 U1.10 | length 67.1
  Top Layer w0.25: 22.199,7.266 22.199,8.941 22.508,9.25 U1.10
  Top Layer w0.3: 22.199,7.266 27.845,1.62 35.204,1.62 37.025,3.44 37.025,9.142 ; 37.028,9.142 38.741,10.855 38.741,14.096 40.85,16.206 40.85,33.403 41.453,34.006 44.38,34.006 45.16,34.786 45.16,38.285 P2.1
PA6: P3.1 U1.16 | length 46.7
  Top Layer w0.25: U1.16 26.25,5.294 27.41,4.134 v1(27.466,4.134)
  Bottom Layer w0.3: v1(27.466,4.134) 30.015,1.585 50.95,1.585 53.682,4.317 53.682,13.273 P3.1
PA8: P1.1 U1.29 | length 67.1
  Top Layer w0.25: U1.29 36.288,10.25
  Top Layer w0.3: 36.288,10.25 37.374,11.336 37.374,16.404 39.713,18.743 v1(39.713,28.456)
  Bottom Layer w0.3: P1.1 10.049,32.996 23.14,32.996 23.707,32.429 27.657,32.429 28.314,31.773 34.687,31.773 36.081,33.166 ; 36.116,33.174 39.885,33.174 40.594,32.465 40.594,29.338 v1(39.713,28.456)
PA9: P6.3 U1.30 | length 47.7
  Top Layer w0.25: U1.30 35.833,10.75
  Top Layer w0.3: v1@33.548,17.319 34.421,16.447 36.352,16.447 36.924,15.874 36.924,11.864 35.83,10.77
  Bottom Layer w0.3: P6.3 18.916,16.624 32.787,16.624 v1@33.328,17.165 ; v1@33.345,17.149 v1(33.531,17.334)
PA10: P6.2 U1.31 | length 50.8
  Top Layer w0.25: U1.31 34.44,11.25 v1@34.903,11.713
  Top Layer w0.3: v1@34.903,11.713 v1(35.052,11.862)
  Bottom Layer w0.3: P6.2 4.445,26.445 4.445,14.072 4.877,13.64 16.393,13.64 18.339,15.586 20.445,15.586 21.595,14.435 32.479,14.435 v1(35.052,11.862)
PA12: U1.33 U3.6 | length 50.2
  Top Layer w0.25: v1(24.151,34.895) v1@24.233,34.813 ; v1@24.227,34.807 v1@24.233,34.813 ; v1@24.346,34.7 v1@24.233,34.813 ; U3.6 25.382,35.963 v1@24.233,34.813 ; U1.33 33.053,12.25 35.489,14.687 35.489,14.785 35.766,15.062 v1(35.766,15.338)
  Bottom Layer w0.3: v1(24.151,34.895) 24.178,34.868 25.935,34.868 28.579,32.223 34.463,32.223 35.926,33.685 40.387,33.685 41.3,32.772 41.3,16.688 39.951,15.338 v1(35.766,15.338)
PA15: U1.38 U3.2 | length 40.7
  Top Layer w0.25: 22.758,38.313 U3.2 ; U1.38 v1@29.75,17.685
  Top Layer w0.3: v1(22.402,28.704) 22.402,28.967 21.852,29.517 21.852,37.429 22.735,38.313 22.758,38.313 ; v1@29.75,17.685 v1(29.794,17.729)
  Bottom Layer w0.3: v1(22.402,28.704) 20.779,28.704 17.55,25.475 17.55,20.965 21.441,17.074 29.139,17.074 v1(29.794,17.729)
PB3: U1.39 U3.3 | length 30.9
  Top Layer w0.25: 22.857,37.8 22.869,37.813 U3.3 ; v1@28.863,19.364 28.863,16.549 29.25,16.163 U1.39
  Top Layer w0.3: v1(22.787,31.454) 22.601,31.639 22.601,32.242 22.391,32.452 22.391,37.332 22.847,37.788 ; v1@28.863,19.364 v1(29.185,19.685)
  Bottom Layer w0.3: v1(22.787,31.454) 22.87,31.537 23.996,31.537 24.315,31.856 25.262,31.856 26.226,30.892 26.226,22.643 v1(29.185,19.685)
PB4: U1.40 U3.5 | length 33.3
  Top Layer w0.25: 23.266,33.407 23.241,33.432 23.241,36.559 23.495,36.813 U3.5 ; 28.245,16.576 28.75,16.071 U1.40
  Top Layer w0.3: 23.266,33.407 24.543,32.13 29.408,32.13 v1(30.977,30.561) ; 28.245,16.576 28.245,20.353 29.261,21.369 30.569,21.369 32.114,22.914 32.114,23.583 ; v1(30.832,24.884) 32.116,23.6
  Bottom Layer w0.3: v1(30.832,24.884) 30.905,24.956 30.905,30.489 v1(30.977,30.561)
PB5: U1.41 U3.4 | length 27.3
  Top Layer w0.25: 22.841,32.722 22.841,37.077 23.077,37.313 U3.4 ; 27.762,19.507 27.762,16.305 28.25,15.817 U1.41
  Top Layer w0.3: 22.841,32.722 23.722,31.841 24.854,30.709 v1(25.033,30.709) ; v1(26.2,21.217) 26.2,21.069 27.762,19.507
  Bottom Layer w0.3: v1(25.033,30.709) 25.033,30.602 25.746,29.888 25.746,22.487 26.015,22.218 26.015,21.403 v1(26.2,21.217)
PB6: P4.1 U1.42 | length 26.9
  Top Layer w0.25: U1.42 27.75,13.866 28.117,13.499 28.117,11.366 v1(28.068,11.317)
  Bottom Layer w0.3: P4.1 5.961,11.914 6.197,11.914 6.672,11.438 27.947,11.438 v1(28.068,11.317)
PB7: U1.43 U3.1 | length 30.1
  Top Layer w0.25: 22.335,38.813 U3.1 ; U1.43 27.25,18.343
  Top Layer w0.3: v1(21.879,26.598) 21.879,26.782 21.402,27.259 21.402,37.879 22.335,38.813 ; v1(26.5,18.794) 26.762,18.794 27.213,18.343 27.25,18.343
  Bottom Layer w0.3: v1(21.879,26.598) 21.879,25.223 21.874,25.218 21.874,23.42 v1(26.5,18.794)
PB8: R8.1 U1.45 U4.23 | length 39.4
  Top Layer w0.25: 24.374,18.009 26.25,16.132 U1.45
  Top Layer w0.3: v1(23.343,18.009) 24.374,18.009 ; U4.23 26.75,30.456 27.226,30.932 v1(27.226,31.195) ; R8.1@35.012,19.662 36.421,18.254 v1(36.421,18.166)
  Bottom Layer w0.3: v1(23.343,18.009) 23.492,17.859 27.447,17.859 28.253,18.664 32.72,18.664 ; v1(27.226,31.195) 27.367,31.195 28.6,29.962 28.6,25.476 27.357,24.232 27.357,22.326 29.058,20.625 30.759,20.625 32.72,18.664 ; v1(36.421,18.166) 36.223,18.166 35.725,18.664 32.72,18.664
PB9: R9.2 U1.46 U4.24 | length 38.2
  Top Layer w0.25: U1.46 25.75,14.141 v1(26.84,13.051)
  Top Layer w0.3: v1(18.607,21.682) 18.607,21.593 19.988,20.212 19.988,15.368 18.966,14.346 v1(18.703,14.346) ; v1(22.809,24.679) 22.809,24.919 23.456,25.566 23.456,28.181 24.75,29.475 U4.24
  Bottom Layer w0.3: v1(18.607,21.682) 18.607,25.312 20.934,27.639 22.266,27.639 22.814,27.092 22.814,24.684 v1(22.809,24.679) ; v1(18.703,14.346) 19.998,13.051 v1(26.84,13.051)
PB11: U1.22 U4.12 | length 41.6
  Top Layer w0.25: 29.25,5.149 U1.22
  Top Layer w0.3: U4.12 28.75,24.203 v1(30.31,22.642) ; 29.243,5.141 32.128,2.256 34.922,2.256 36.316,3.65 36.316,9.262 38.176,11.122 38.176,15.812 v1(39.238,16.874)
  Bottom Layer w0.3: v1(30.31,22.642) 30.496,22.828 30.875,22.828 31.041,22.994 35.502,22.994 39.238,19.258 v1(39.238,16.874)
PC13: D2.2 U1.2 | length 14.2
  Top Layer w0.25: 21.255,13.25 U1.2
  Top Layer w0.3: D2.2@20.191,4.099 18.046,6.244 18.046,10.015 21.275,13.244 ; D2.2 D2.2@20.438,4.729
SWCLK: P5.2 U1.37 | length 34.1
  Top Layer w0.25: v1(29.106,13.093) 30.25,14.237 U1.37
  Bottom Layer w0.3: v1(29.106,13.093) 31.273,10.927 41.153,10.927 47.371,17.145 47.371,24.101 P5.2
SWDIO: P5.3 U1.34 | length 31
  Top Layer w0.25: U1.34 32.407,12.75 33.593,13.936
  Top Layer w0.3: v1(33.511,15.224) 33.647,15.089 33.647,13.989 33.593,13.936
  Bottom Layer w0.3: v1(33.511,15.224) 35.07,13.665 41.554,13.665 42.926,15.037 42.926,22.196 P5.3
V3.3: C2.2 C6.2 C7.2 C8.2 C9.2 C10.2 C11.2 C12.2 C15.1 C16.1 C23.2 C25.2 D1.2 P5.4 R2.2 R8.2 R9.1 U1.1 U1.9 U1.24 U1.36 U1.48 U2.2 U2.4 U3.7 U3.15 U3.18 U4.8 U4.13 | length 245.7
  Top Layer w0.25: U1.9 25.059,9.75 25.868,8.941 26.639,8.941 27.868,10.17 ; U1.1 24.276,13.75 ; U1.48 24.75,14.224 24.276,13.75 ; 26.993,33.884 U3.7@26.993,35.738 ; U3.7@27,35.738 U3.7@27,35.957 ; U3.18 27.5,41.114 ; 27.849,10.189 24.289,13.75 24.276,13.75 ; U3.15 29.575,38.813 29.575,38.821 31.134,40.381 ; 30.704,20.558 30.704,13.771 30.725,13.75 ; U1.36 30.725,13.75 ; 32.022,4.125 30.25,5.897 U1.24 30.25,11.561 30.25,13.275 30.725,13.75
  Top Layer w0.3: C2.2 10.875,47.422 11.481,47.422 12.014,47.955 12.014,50.952 13.157,52.095 19.173,52.095 20.062,51.206 C6.2 C7.2 C8.2 C9.2 C10.2 C11.2 C11.2@20.062,32.994 ; R2.2 10.95,11.938 12.852,13.84 12.852,15.443 R9.1@17.12,19.711 ; R9.1 17.137,19.662 18.814,17.985 v1(18.957,17.985) ; v1(18.532,32.061) 19.409,32.938 20.006,32.938 C11.2@20.062,32.994 ; C25.2 C12.2 C11.2@20.062,32.994 ; C8.2@20.162,44.142 U2.4 U2.2 29.881,53.114 44.089,53.114 ; v1(24.811,23.688) 24.997,23.874 25.623,23.874 26.725,24.976 26.725,25.5 U4.8 ; 26.993,33.83 27.733,33.09 ; U2.4@27.102,44.104 27.102,41.513 27.5,41.114 ; 27.733,33.061 31.179,33.061 32.257,31.983 35.195,31.983 ; 27.868,10.17 28.859,10.17 30.25,11.561 30.259,11.57 ; U2.4@28.447,44.123 28.457,44.113 29.344,44.113 31.134,42.323 31.134,40.381 ; U4.13 30.886,26.25 33.372,23.765 ; 30.705,20.559 30.705,20.862 33.585,23.742 ; 32.022,4.125 D1.2 ; 33.369,23.742 33.585,23.742 ; C23.2 34.937,22.086 36.957,20.066 37.863,20.066 R8.2 ; C15.1 C15.1@34.989,37.074 ; C15.1@34.989,37.337 C15.1@34.989,37.074 ; C23.2@35.09,23.742 33.585,23.742 ; C23.2@35.139,23.348 36.293,24.502 36.293,30.884 35.195,31.983 ; 35.16,32.009 35.164,32.013 ; 35.22,31.983 35.195,31.983 ; C15.1@35.305,36.757 C15.1@34.989,37.074 ; v1(43.688,35.034) 43.688,35.297 44.125,35.734 C16.1 44.125,38.08 45.314,39.268 45.314,51.889 44.099,53.104 ; C15.1@34.989,37.074 34.989,36.749 36.312,35.425 v1(36.384,35.425) 36.414,35.396 36.414,33.263 35.164,32.013 ; 35.164,32.013 35.195,31.983
  Bottom Layer w0.3: v1(18.957,17.985) 17.1,19.842 17.1,30.629 v1(18.532,32.061) 20.502,32.061 24.841,27.722 24.841,23.718 v1(24.811,23.688) ; v1(36.384,35.425) 37.545,34.265 46.545,34.265 ; v1(43.688,35.034) 43.844,35.19 44.773,35.19 44.863,35.281 45.529,35.281 46.545,34.265 ; P5.4 46.545,34.265
VDD_PA: C20.2 C21.2 L3.2 U3.11 | length 16.8
  Top Layer w0.25: U3.11 30.886,36.813
  Top Layer w0.3: 30.886,36.813 32.949,38.875 35.739,38.875 L3.2@37.364,40.5 ; L3.2 C21.2 C20.2
XC1: C13.1 R6.2 U3.10 Y2.1 | length 42.2
  Top Layer w0.25: U3.10 30.318,35.963 30.689,35.592 v1(30.965,35.592)
  Top Layer w0.3: Y2.1 12.375,25.431 13.8,26.856 R6.2 ; C13.1@13.8,40.478 R6.2 ; v1(15.406,38.842) 15.38,38.817 15.38,37.757 14.748,37.125 R6.2
  Bottom Layer w0.3: v1(15.406,38.842) 25.693,38.842 26.722,37.813 28.744,37.813 v1(30.965,35.592)
XC2: C14.1 R6.1 U3.9 Y2.2 | length 50
  Top Layer w0.25: U3.9@27.998,36.061 27.998,35.545 28.36,35.183 ; 28.408,35.183 29.054,35.183
  Top Layer w0.3: R6.1 R6.1@10.95,37.095 ; v1(12.233,35.301) 12.047,35.487 12.047,35.753 R6.1@10.95,36.85 ; Y2.2 12.375,33.274 10.95,34.699 R6.1@10.95,36.85 ; C14.1 13.875,42.672 12.32,41.117 12.32,38.466 R6.1@10.95,37.095 ; 29.054,35.183 30.235,34.002 v1(32.211,34.002) ; R6.1@10.95,36.85 R6.1@10.95,37.095
  Bottom Layer w0.3: v1@12.233,35.362 12.233,37.241 15.051,40.059 29.799,40.059 32.211,37.647 v1(32.211,34.002)
pads on no net: U1.3 U1.4 U1.11 U1.12 U1.13 U1.14 U1.15 U1.17 U1.18 U1.19 U1.20 U1.21 U1.25 U1.26 U1.27 U1.28 U1.32 U3.21 U4.2 U4.3 U4.4 U4.5 U4.6 U4.7 U4.14 U4.15 U4.16 U4.17 U4.19 U4.21 U4.22 U4.25
copper on no net:
  other v2: 26.95,26.95 28.05,26.95 26.95,28.05 28.05,28.05 26.95,37.263 28.05,37.263 26.95,38.363 28.05,38.363

## Keep-outs
Keep-Out Layer:
  the board outline again, w0.254

## Silkscreen, mask and mechanical layers (free items; w line width, h text height)
Top Overlay:
  text "PWM" at 53.255,43.202 h0.5
  text "GND" at 0.471,42.389 h0.5
  text "PWR" at 53.218,39.893 h0.5
  text "PWR" at 0.464,39.818 h0.5
  text "GND" at 53.226,37.146 h0.5
  text "PWM" at 0.375,36.488 h0.5
  text "V3.3" at 52.141,31.195 h0.5
  text "TX" at 0.971,29.857 h0.5
  text "SWDIO" at 52.196,28.541 h0.5
  text "RX" at 0.946,27.235 h0.5
  text "SWCLK" at 52.114,25.996 h0.5
  text "GND" at 0.411,23.9 h0.5
  text "GND" at 52.264,22.619 h0.5
  text "PWM" at 53.19,18.025 h0.5
  text "GND" at 0.482,17.164 h0.5
  text "PWR" at 53.228,14.72 h0.5
  text "PWR" at 0.415,14.613 h0.5
  text "GND" at 53.212,11.841 h0.5
  text "PWM" at 0.482,11.286 h0.5